# Altium PCB PCB.PcbDoc
Units mil, origin at the board's own origin, x right, y up, seen from the top; angles counter-clockwise.
Board outline 2700.53 x 2100.53 mil, 2 copper layers (Top Layer, Bottom Layer), stack 62.8 mil thick; 15 components, 31 nets, 62 pads, 22 vias.
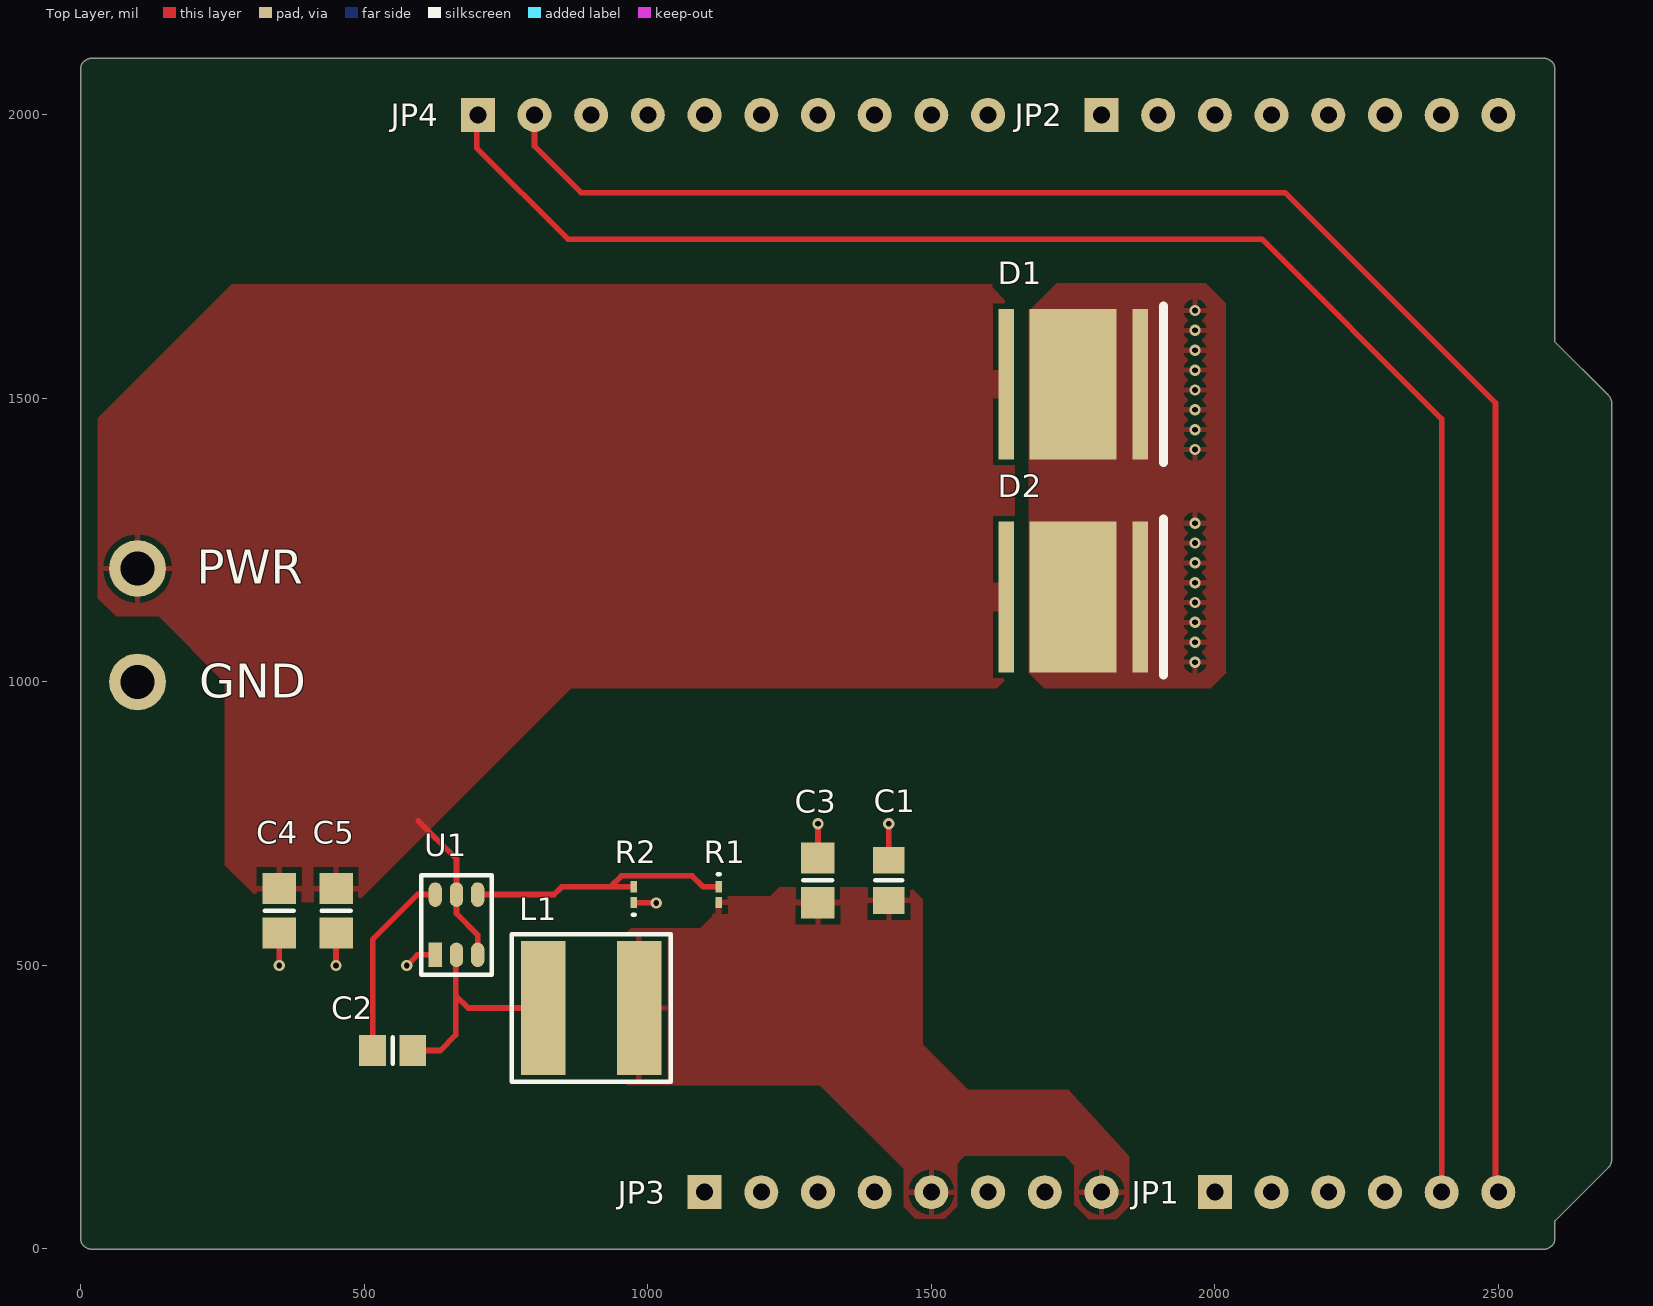
[diagram p0: Top Layer view]
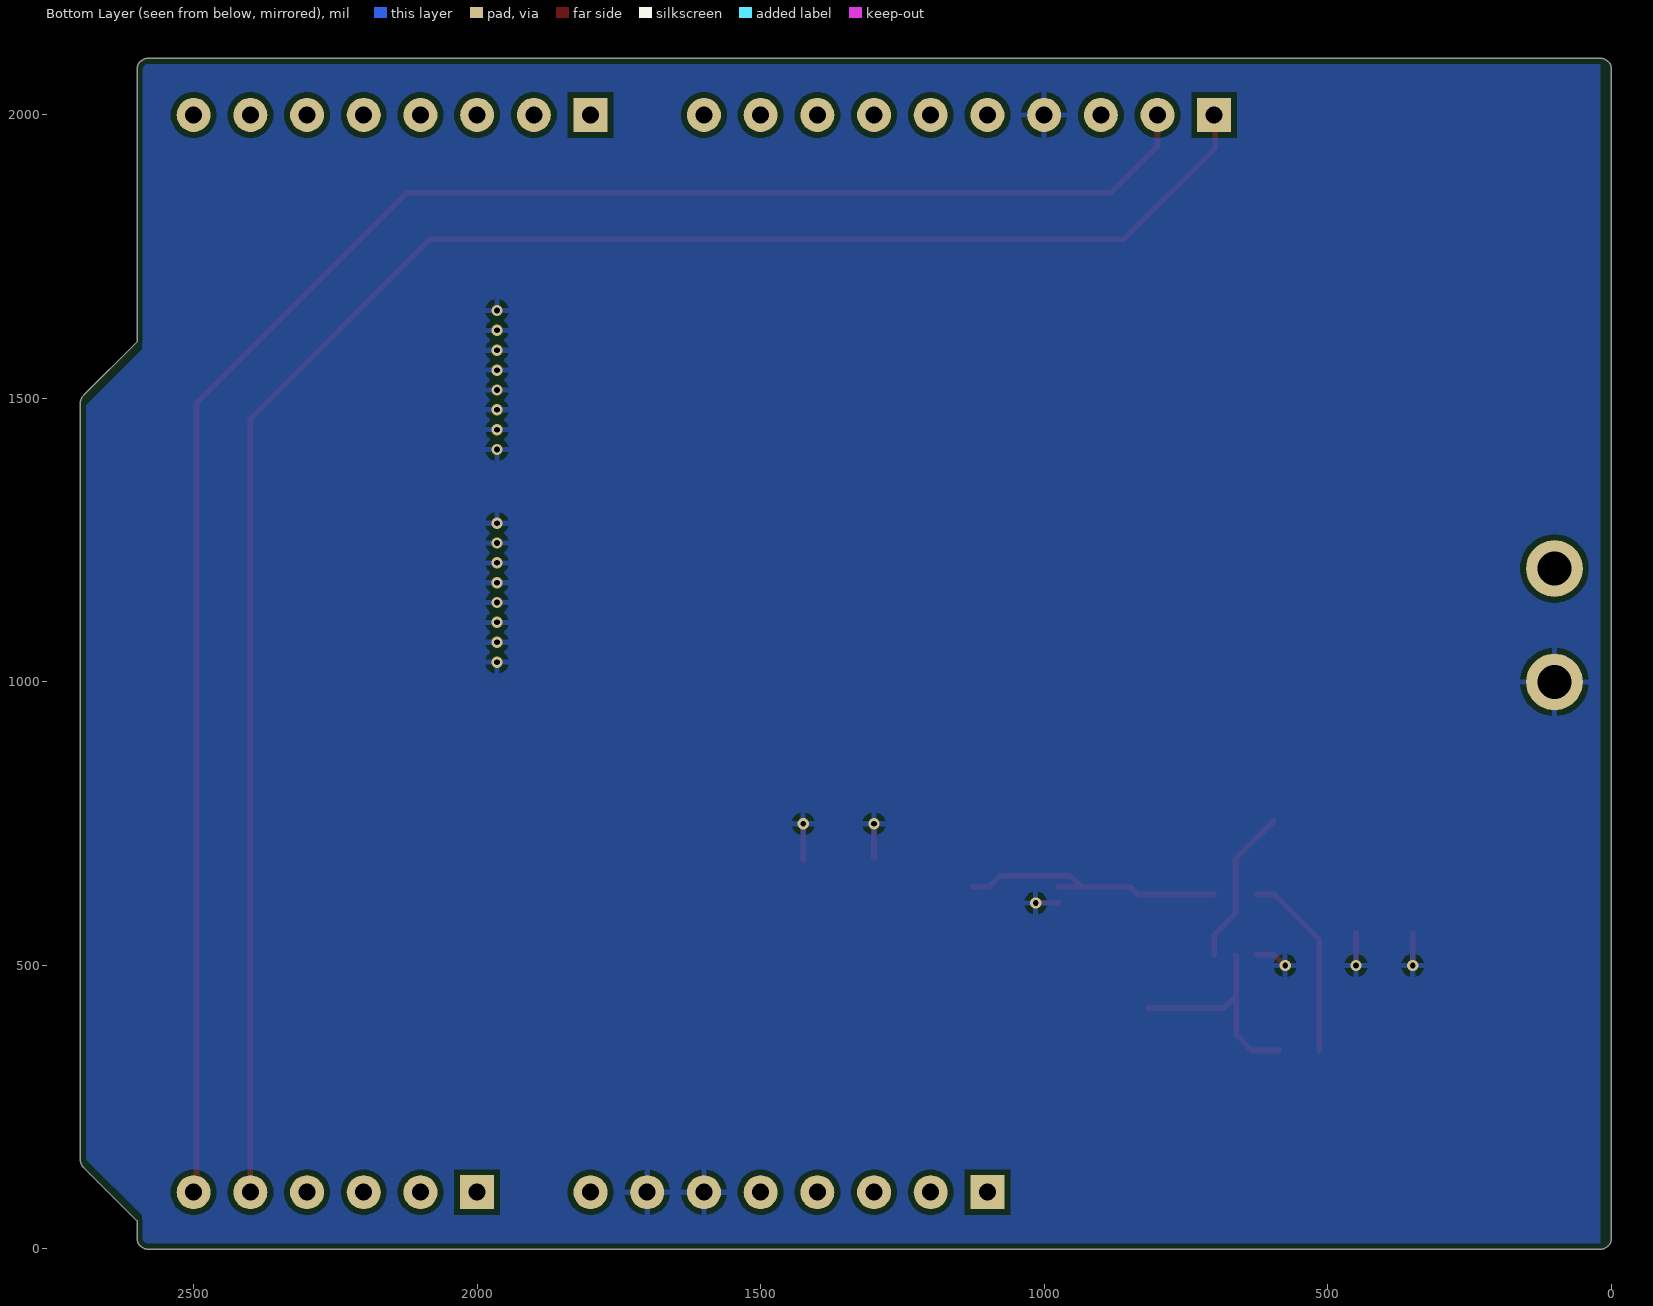
[diagram p1: Bottom Layer view, seen from below]

## Layer stack, top to bottom
Top Solder: solder mask 0.4, Solder Resist, Dk 3.5
Top Layer: signal copper 1.4
Dielectric 1: dielectric 60, FR-4, Dk 4.8
Bottom Layer: signal copper 1.4
Bottom Solder: solder mask 0.4, Solder Resist, Dk 3.5

## Board outline
19.31,-0.64 cw(c19.31,19.31) -0.64,19.31 -0.64,2079.94 cw(c19.31,2079.94) 19.31,2099.89 2579.94,2099.89 cw(c2579.94,2079.94) 2599.89,2079.94 2599.89,1599.73 2694.04,1505.57 cw(c2679.94,1491.47) 2699.89,1491.47 2699.89,157.77 cw(c2679.94,157.77) 2694.04,143.67 2599.89,49.51 2599.89,19.31 cw(c2579.94,19.31) 2579.94,-0.64

## Design rules (kind name [scope] priority, off if disabled: settings)
BoardOutlineClearance [All] p1: gap=10 ignorepadtopadclearanceinfootprint=FALSE
Clearance [All] p1: gap=10 ignorepadtopadclearanceinfootprint=TRUE except(0: Arc-Hole Track-Hole SMDPad-Hole THPad-Hole Via-Hole Fill-Hole Poly-Hole Region-Hole Text-Hole)
MinimumSolderMaskSliver [All] p1: minsoldermaskwidth=5
PolygonConnect [All] p1: connectstyle=Relief reliefconductorwidth=10 reliefentries=4 polygonreliefangle="90 Angle" airgapwidth=10
RoutingVias [All] p1: holewidth=10 width=18 viastyle="Through Hole" minholewidth=6 minwidth=14 maxholewidth=28 maxwidth=50
SilkToSilkClearance [All] p1: silktosilkclearance=5
SilkToSolderMaskClearance [IsPad] p1: minsilkscreentomaskgap=5 clearancetoexposedcopper=TRUE
SolderMaskExpansion [All] p1: expansion=4 istentingtop=FALSE
Width [All] p1: maxlimit=10 minlimit=10 preferedwidth=10
27 further rules are at their usual default settings.

## Components (designator, comment, footprint, x,y, rotation, side; value= is the part's Value field where it differs from the comment)
C1 "C2012X5R1V106K085AC" 6-0805_N 1425,650 r270 top
C2 "08053C104KAT2A" 6-0805_N 550,350 r0 top
C3 "C2012X5R1V106K085AC" 6-0805_M 1300,650 r270 top
C4 "C2012X5R1V106K085AC" 6-0805_M 350,596.5 r90 top
C5 "C2012X5R1V106K085AC" 6-0805_M 450,596.5 r90 top
D1 "MKRAWT-00-0000-0D0HG235H" CREE-MK-R-2_V 1750,1525 r0 top
D2 "MKRAWT-00-0000-0D0HG235H" CREE-MK-R-2_V 1750,1150 r0 top
JP1 "Pin_header_1x6" Pin_header_1x6 2000,100 r90 top locked
JP2 "Pin_header_1x8" Pin_header_1x8 1800,2000 r90 top locked
JP3 "Pin_header_1x8" Pin_header_1x8 1100,100 r90 top locked
JP4 "Pin_header_1x10" Pin_header_1x10 700,2000 r90 top locked
L1 "SRN6045-4R7Y" SRN6045-4R7Y 900,425 r180 top
R1 "RC0201FR-0710KL" 0603 1125,625 r270 top
R2 "RC0201FR-0756K2L" 0603 975,625 r90 top
U1 "TPS562200DDCR" TPS562200DDCR 625,518.7 r90 top

## Footprints (in the part's own frame and the unit in brackets; to place one, negate y for a bottom-side part, rotate by r counter-clockwise, add the part's x,y. Pads: shape width x height; smd on the part's side, far side on the other; paste and mask are expansions set on the pad)
6-0805_M [mm] "Chip Resistor, Body 2.0x1.2mm, IPC Low Density"
  rect 1.4x1.5 smd: 1(-1,0) 2(1,0)
  silkscreen extent 0,-0.65 0,0.65, body extent -1.07,-0.7 1.07,0.7, height 0.7
6-0805_N [mm] "Chip Resistor, Body 2.0x1.2mm, IPC Medium Density"
  rect 1.2x1.4 smd: 1(-0.9,0) 2(0.9,0)
  silkscreen extent 0,-0.6 0,0.6, body extent -1.07,-0.7 1.07,0.7, height 0.7
0603 [mm] "Chip Inductor, Body 0.6x0.3mm, IPC High Density"
  rect 0.5x0.3 smd: 1(-0.35,0) 2(0.35,0)
  silkscreen extent -0.9,-0.05 -0.9,0.05, body extent -0.33,-0.18 0.33,0.18, height 0.55
CREE-MK-R-2_V [mm] "SMD, 2-Leads, Body 7x7mm, Thermal Pad 3.9x6.76mm"
  rect 0.7x6.76 smd: 1(-3,0) 2(3,0)
  rect 3.9x6.76 smd: 3(0,0)
  silkscreen extent 4.05,-3.5 4.05,3.5, body extent -3.5,-3.5 3.5,3.5, height 4.1
Pin_header_1x6 [mil]
  rect 60x60 hole 30: 1(0,0)
  round 60 hole 30: 2(0,-100) 3(0,-200) 4(0,-300) 5(0,-400) 6(0,-500)
Pin_header_1x8 [mil]
  rect 60x60 hole 30: 1(0,0)
  round 60 hole 30: 2(0,-100) 3(0,-200) 4(0,-300) 5(0,-400) 6(0,-500) 7(0,-600) 8(0,-700)
Pin_header_1x10 [mil]
  rect 60x60 hole 30: 1(0,0)
  round 60 hole 30: 2(0,-100) 3(0,-200) 4(0,-300) 5(0,-400) 6(0,-500) 7(0,-600) 8(0,-700) 9(0,-800) 10(0,-900)
SRN6045-4R7Y [mm]
  rect 2x6 smd: 1(-2.15,0) 2(2.15,0)
  silkscreen extent -3.56,-3.3 3.56,3.3, body extent -3,-3 3,3, height 4.51
TPS562200DDCR [mm]
  rect 1.1x0.6 smd: 1(0,0)
  oval 1.1x0.6 smd: 2(0,-0.95) 3(0,-1.9) 4(2.7,-1.9) 5(2.7,-0.95) 6(2.7,0)
  silkscreen extent -0.89,-2.54 3.56,0.64, body extent 0,-2.34 2.8,0.56, height 0.97

## Part data
C1 C3 C4 C5: Mfr_Name=TDK, Supplier Part Number 1=445-14417-1-ND, Supplier 1=Digikey
C2: Mfr_Name="KYOCERA AVX", Supplier Part Number 1=96M1381, Supplier 1=Avnet
D1 D2: library part CMP-2100-00977-1, "LED, White, 12 V, 2-Pin SMD, RoHS, Tape and Reel"
L1: "No Description Available", Mfr_Name="Bourns Electronics"
R1: Mfr_Name=Yageo, Supplier Part Number 1=4031233, Supplier 1="Future Electronics"
R2: "No Description Available", Mfr_Name=Yageo, Supplier Part Number 1=5109860, Supplier 1="Future Electronics", Type="Chip Resistor - Surface Mount"
U1: "No Description Available", Alternate_Manufacturer=None, CurrentDate="Not shown in title block", Manufacturer="Texas Instruments", PartNumber=TPS562200DDC, Supplier Part Number 1=595-TPS562200DDCR, Address1="Not shown in title block", Address2="Not shown in title block", Address3="Not shown in title block", Address4="Not shown in title block", ApprovedBy="Not shown in title block", Author="Not shown in title block", CheckedBy="Not shown in title block", CompanyName="Not shown in title block", ComponentLink1Description="Datasheet Link", ComponentLink1URL=https://sps06.itg.ti.com/sites/KMS/crossdivteams/altium/docs/ComponentDatasheets/TPS562200_DS_v08_13_0909.docx, CompType=IC, CurrentTime="Not shown in title block", Date="Not shown in title block", DocumentFullPathAndName="Not shown in title block", DocumentName="Not shown in title block", DocumentNumber=1, Engineer="Not shown in title block", ImagePath="Not shown in title block", LatestRevisionDate=2014-02-20, Mfr_Name="Texas Instruments", ModifiedDate="Not shown in title block", MountType=SMT, Organization="Not shown in title block", PackageReference=DDC0006A, Publisher="Texas Instruments", RefDes=Refdes, Revision="Use project parameter SCH_Rev", RoHS=Y, SheetNumber=1, SheetTotal=1, Supplier 1=Mouser, SymbolCreator=a0411947, SymbolVersion=2013-09-26, Time="Not shown in title block", Type=Type, U/M=EA

## Free pads (board coordinates)
  round 100 hole 60: 2(100,1200) 3(100,1000)

## Via types
v1: diameter 20, hole 10, Top Layer to Bottom Layer, 22 vias

## Nets (pads, with @x,y where several pads share a name; then routed paths per layer and width w, separated by ;. In a path a pad name is that pad's centre, name@x,y a point inside that pad or via, vN(x,y) a via of type N, cw(c..) or ccw(c..) an arc to the next point about the centre after c; other vN are vias at no path point)
"3.3 V": JP3.4
+5: C1.2 C3.2 JP3.5 JP3.8 L1.1 R1.2
+12: C4.2 C5.2 D1.1 D2.1 pad.2 U1.3 U1.5 | length 279.7
  Top Layer w10: 595,755 662.4,687.6 U1.5 662.4,591.6 699.8,554.2 U1.3
A0: JP1.1
A1: JP1.2
A2: JP1.3
A3: JP1.4
A4: JP1.5 JP4.1 | length 3322.8
  Top Layer w10: JP4.1 698,1998 698,1942 859,1781 2083,1781 2400,1464 JP1.5
A5: JP1.6 JP4.2 | length 3331.7
  Top Layer w10: JP4.2 800,1945 882,1863 2124,1863 2495,1492 2495,105 JP1.6
AREF: JP4.3
D0: JP2.8
D1: JP2.7
D2: JP2.6
D3: JP2.5
D4: JP2.4
D5: JP2.3
D6: JP2.2
D7: JP2.1
D8: JP4.10
D9: JP4.9
D10: JP4.8
D11: JP4.7
D12: JP4.6
D13: JP4.5
GND: C1.1 C3.1 C4.1 C5.1 D1.2 D1.3 D2.2 D2.3 JP3.6 JP3.7 JP4.4 pad.3 R2.1 U1.1 | length 337.7
  Top Layer w10: v1(350,500) C4.1 ; v1(450,500) C5.1 ; v1(575,500) 593.7,518.7 U1.1 ; R2.1 975.61,610.61 1014.39,610.61 v1(1015,610) ; C3.1 v1(1300,750) ; C1.1 v1(1425,750)
  other v1: 1965,1035 1965,1070 1965,1105 1965,1140 1965,1175 1965,1210 1965,1245 1965,1280 1965,1410 1965,1445 1965,1480 1965,1515 1965,1550 1965,1585 1965,1620 1965,1655
IOREF: JP3.2
N-C: JP3.1
NetC2_1: C2.1 U1.6 | length 338.9
  Top Layer w10: C2.1 514.57,545.57 594,625 U1.6
NetR1_1: R1.1 R2.2 U1.4 | length 487.8
  Top Layer w10: U1.4 834.56,625 848.34,638.78 934,638.78 ; R2.2 934,638.78 ; R1.1 1097.22,638.78 1078,658 953.22,658 934,638.78
RESET: JP3.3
"SW OUT": C2.2 L1.2 U1.2 | length 392.6
  Top Layer w10: C2.2 634,350 661,377 661,447.15 ; U1.2 661,517.3 661,447.15 ; L1.2 683.15,425 661,447.15

## Polygon pours and split planes (outlines as drawn)
+5 on Top Layer "+5_L01_P008" (solid, pour order 8): 1846,166 1849,163 1849,75 1826,52 1778,52 1752,78 1752,147 1735,164 1559,164 1541,146 1492,195 1492,246 1546,300 1565,281 1741,281
+5 on Top Layer "+5_L01_P007" (solid, pour order 7): 946,542 970,566 1092,566 1114,588 1114,616 1120,622 1216,622 1232,638 1464,638 1485,617 1485,361 1546,300 1546,75 1524,53 1472,53 1451,74 1451,141 1303,289 964,289 945,308 945,543
+12 on Top Layer "+12_L01_P006" (solid, pour order 6): 1645,1658 1607,1696 1607,1701 266,1701 30,1465 30,1148 62,1116 137,1116 254,999 254,677 320,611 487,611 865,989 1615,989 1647,1021 1647,1658
GND on Top Layer "GND_L01_P005" (solid, pour order 5): 1672,1656 1672,1016 1699,989 1993,989 2021,1017 2019,1019 2019,1668 1984,1703 1721,1703 1674,1656
GND on Bottom Layer "GND_L02_P000" (solid, pour order 0): 19.31,10 2591,10 2591,59 2690,158 2690,1488 2591,1587 2591,2089 19.31,2089

## Other copper
Bottom Layer:
  pour cut-out: 0,0 0,13 0.5,13.5 10,4 10,0 0,0 -1,1
Multi-Layer:
  pour cut-out: -1,15 2,12 2,8 10,0 0,0 -1,1

## Silkscreen, mask and mechanical layers (free items; w line width, h text height)
Top Overlay:
  text "PWR" at 204,1173 h60
  text "GND" at 209,972 h60